# Altium PCB USB-IRIS-W1.PcbDoc (part 1 of 3)
Units mm, origin at the board's own origin, x right, y up, seen from the top; angles counter-clockwise.
Board outline 87.91 x 18 mm, 4 copper layers (Top Layer, Layer 2, Layer 3, Bottom Layer), stack 2.472 mm thick; 87 components, 85 nets, 417 pads, 400 vias.
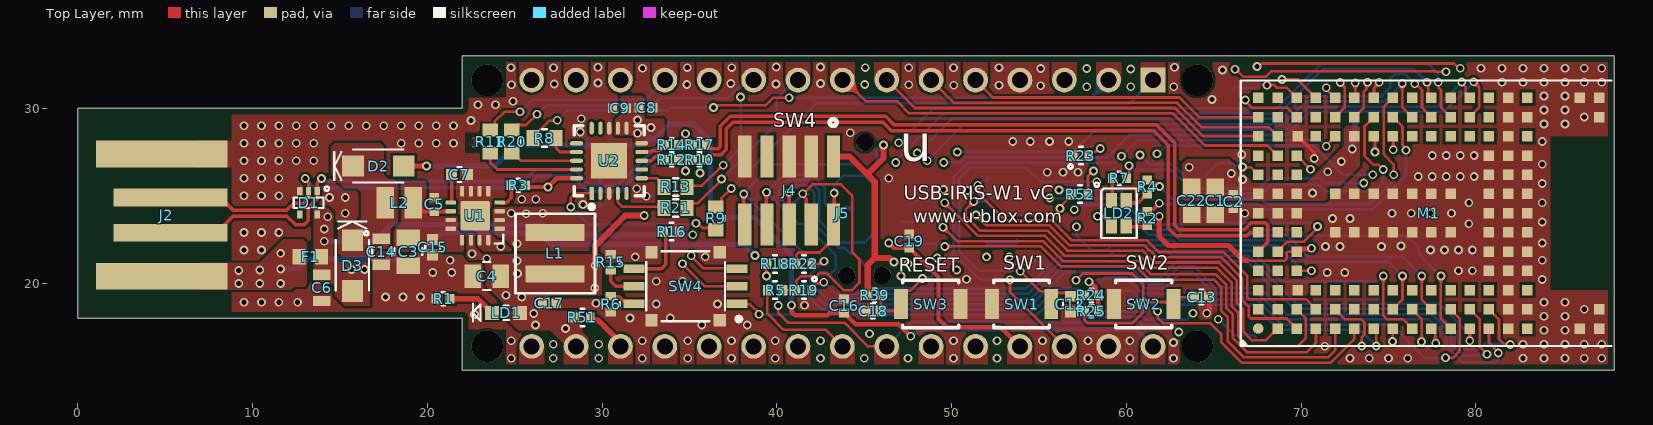
[diagram p0: Top Layer view]
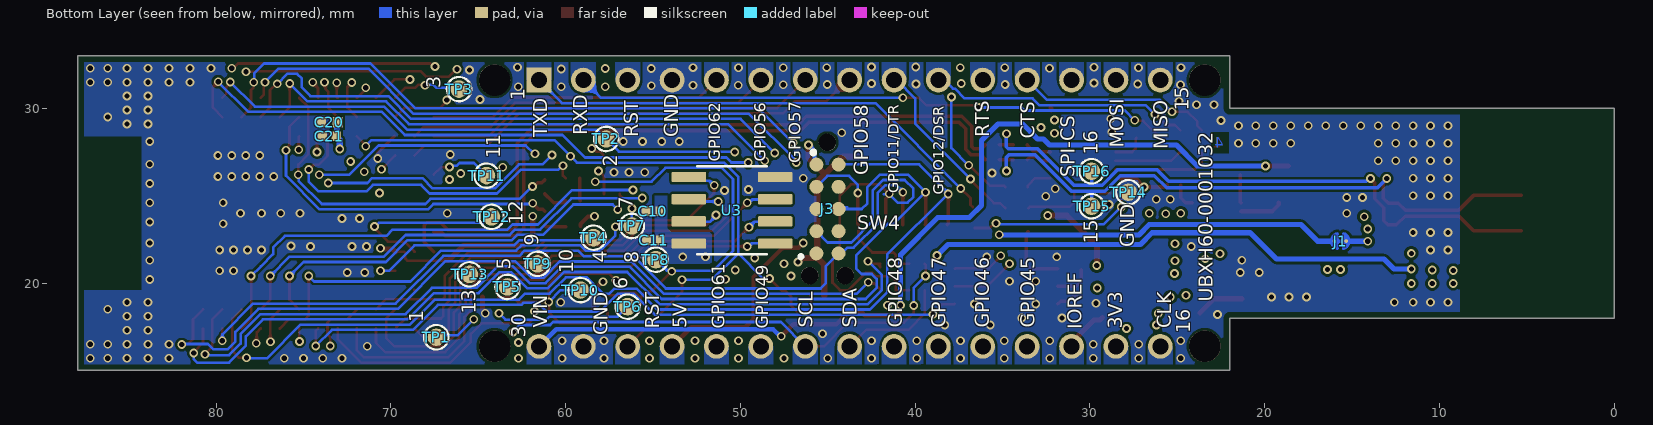
[diagram p1: Bottom Layer view, seen from below]
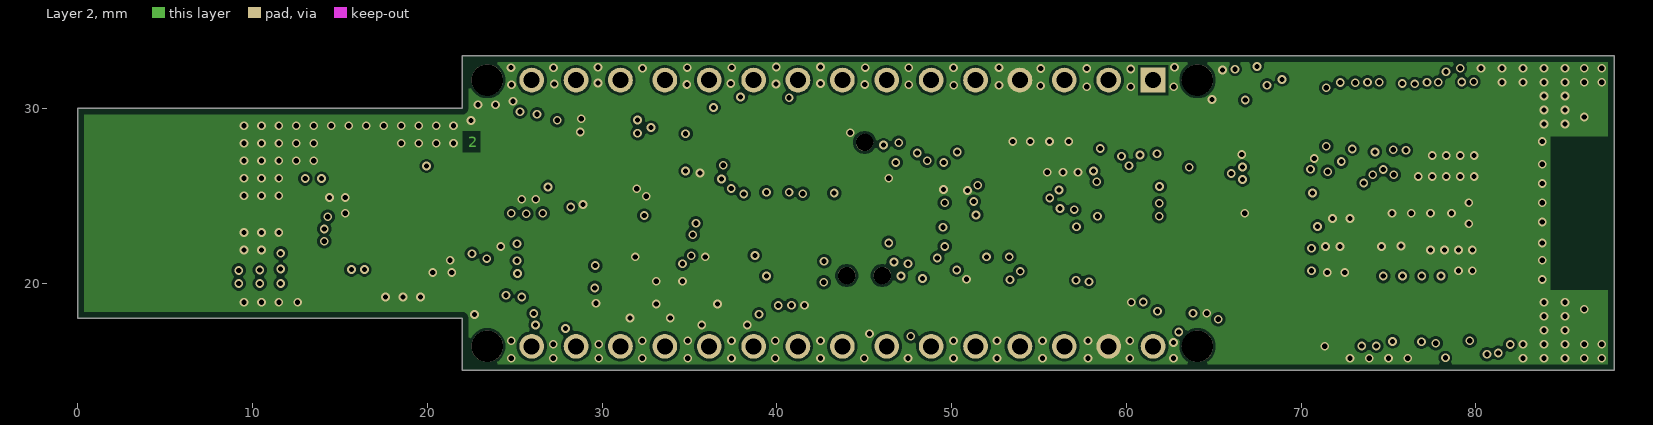
[diagram p2: Layer 2]
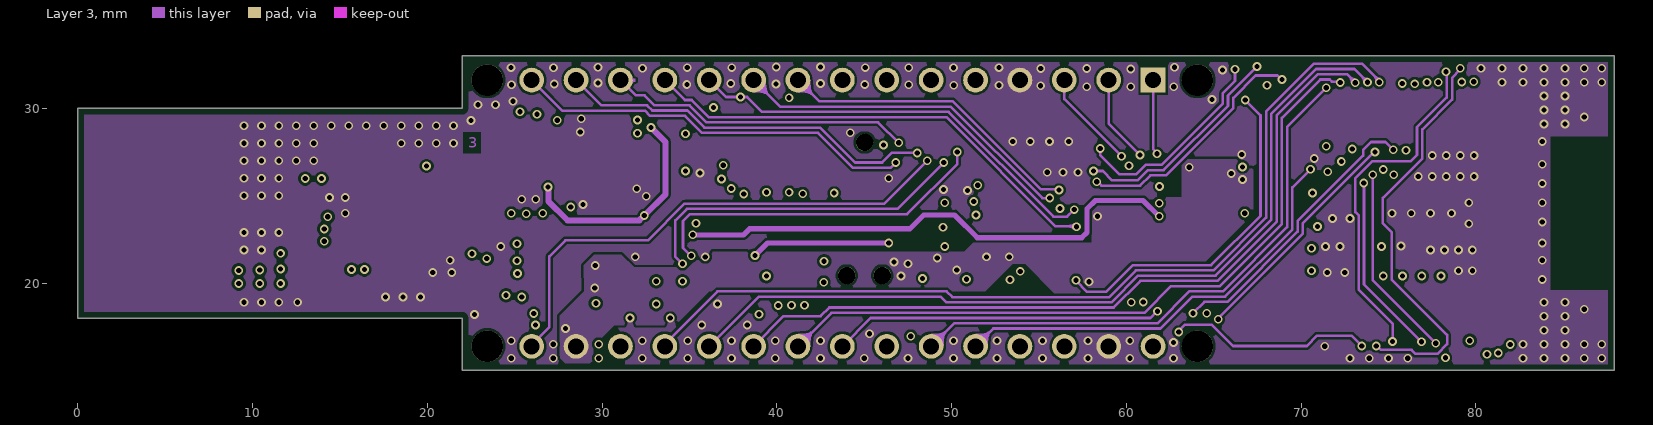
[diagram p3: Layer 3]

## Layer stack, top to bottom
Top Solder: solder mask 0.0102, Solder Resist, Dk 3.5
Top Layer: signal copper 0.035
Dielectric 2: prepreg 0.18, Prepreg 1080, Dk 3.77
Layer 2: signal copper 0.018
Dielectric10: core 2.0057, Core-039, Dk 4.8
Layer 3: signal copper 0.018
Dielectric 7: prepreg 0.18, Prepreg 1080, Dk 3.77
Bottom Layer: signal copper 0.035
Bottom Solder: solder mask 0.0102, Solder Resist, Dk 3.5

## Board outline
0,18 0,30 22,30 22,33 87.909,33 87.909,15 22,15 22,18

## Design rules (kind name [scope] priority, off if disabled: settings)
AssemblyTestPointUsage [All] p1 off:
AssemblyTestpoint [All] p1 off: testpointundercomponent=TRUE minsize=1.016 maxsize=2.54 preferedsize=1.524 minholesize=0 maxholesize=1.016 preferedholesize=0.813 testpointgrid=0.025 usegrid=TRUE gridtolerance=0 allowsidetop=TRUE allowsidebottom=TRUE
BoardOutlineClearance [All] p1: gap=0.356 ignorepadtopadclearanceinfootprint=FALSE
Clearance Clearance_1 [OnLayer('Top Layer')] p1: gap=0.15 ignorepadtopadclearanceinfootprint=TRUE except(0: Arc-Hole Track-Hole SMDPad-Hole THPad-Hole Via-Hole Fill-Hole Poly-Hole Region-Hole Text-Hole)
Clearance [All] p2: gap=0.15 ignorepadtopadclearanceinfootprint=FALSE except(0: Arc-Hole Track-Hole SMDPad-Hole THPad-Hole Via-Hole Fill-Hole Poly-Hole Region-Hole Text-Hole)
Clearance NoPlatedPAd [InPadClass('NPTH_Pads')] p3: gap=0.15 ignorepadtopadclearanceinfootprint=TRUE except(0.25: Fill-Hole Poly-Hole Region-Hole)
Clearance DIFF_100 [InNetClass('DIFF100')] p4: gap=0.25 ignorepadtopadclearanceinfootprint=TRUE except(0: Arc-Hole Track-Hole SMDPad-Hole THPad-Hole Via-Hole Fill-Hole Poly-Hole Region-Hole Text-Hole)
DiffPairsRouting [InDifferentialPairClass('DIFF100')] p1 off: maxlimit=1 minlimit=0.05 mostfreqgap=0.15 toplayer_mingap=0.15 toplayer_minwidth=0.3 toplayer_maxwidth=1 toplayer_prefwidth=0.3 bottomlayer_mingap=0.15 bottomlayer_minwidth=0.3 bottomlayer_maxwidth=1 bottomlayer_prefwidth=0.3 impedanceprofiledriven=TRUE impedanceprofileid={4EB0315E-D057-4056-870E-F8970DFE5718} impedanceprofilevalue=100.000000 maxuncoupledlength=12.7
FabricationTestPointUsage [All] p1 off: valid=0 allowmultiple=FALSE
FabricationTestpoint [All] p1 off: side=3 testpointundercomponent=TRUE minsize=1.016 maxsize=2.54 preferedsize=1.524 minholesize=0 maxholesize=1.016 preferedholesize=0.813 testpointgrid=0.025 allowsidetop=TRUE allowsidebottom=TRUE usegrid=TRUE gridtolerance=0
HoleSize [All] p1: absolutevalues=TRUE maxlimit=2.54 minlimit=0.2 maxpercent=80.000 minpercent=20.000
HoleToHoleClearance [All] p1: gap=0.25 allowstackedmicrovias=TRUE
MatchedLengths DiffPair_DIFF100MatchedLengths [InNetClass('DIFF100')] p1: tolerance=0.1 checknetsindiffpair=TRUE checkdiffpairvsdiffpair=FALSE checkxsignals=FALSE checkothers=FALSE usedelayunits=TRUE delaytolerance=10.000000
MinimumSolderMaskSliver MinimumSolderMaskSliver_1 [InComponent('U4')] p1: minsoldermaskwidth=0.05
MinimumSolderMaskSliver [All] p2: minsoldermaskwidth=0.1
PlaneClearance Shape_via [InNet('3V3') And GND] p2: clearance=0.25
PolygonConnect GND_ [InNet('GND') and IsVia and IsPad] p1 off: thpad.connectstyle=Relief thpad.reliefconductorwidth=0.254 thpad.reliefentries=4 thpad.polygonreliefangle="90 Angle" thpad.airgapwidth=0.254 smdpad.connectstyle=Direct smdpad.reliefconductorwidth=0.254 smdpad.reliefentries=4 smdpad.polygonreliefangle="90 Angle" smdpad.airgapwidth=0.254 via.connectstyle=Direct via.reliefconductorwidth=0.254 via.reliefentries=4 via.polygonreliefangle="90 Angle" via.airgapwidth=0.254
PolygonConnect PolygonConnect_1 [All] p2: connectstyle=Direct reliefconductorwidth=0.254 reliefentries=4 polygonreliefangle="90 Angle" airgapwidth=0.254
RoutingVias [All] p1: holewidth=0.35 width=0.7 viastyle="Through Hole" minholewidth=0.35 minwidth=0.6 maxholewidth=0.35 maxwidth=0.6 useviatemplates=TRUE viatemplateguid#1={9B9B2C8B-3407-41E5-9278-FA540D01F2C8} viatemplateguid#2={13CDBC89-8302-4A6B-AFA1-809CA17073A7} viatemplateguid#3={858E1B08-E57D-4438-9A77-3527DEC644EC} viatemplatename#1=v350h250 viatemplatename#2=v500h250 viatemplatename#3=v550h0300
SilkToSilkClearance [All] p1: silktosilkclearance=0.1
SilkToSolderMaskClearance [IsText] p1: minsilkscreentomaskgap=0.075 clearancetoexposedcopper=TRUE
SolderMaskExpansion TentedVias [isvia] p1: expansion=0.05 istentingtop=TRUE
SolderMaskExpansion [All] p2: expansion=0.05 istentingtop=FALSE
UnRoutedNet [All] p1: checkbadconnections=TRUE
UnpouredPolygon [All] p1 off:
ViasUnderSMD [All] p1: allowed=TRUE
Width Width_1 [All] p1: maxlimit=1.5 minlimit=0.15 preferedwidth=0.254 minimp=50.000000 maximp=50.000000 favimp=50.000000
Width [All] p2: maxlimit=1.5 minlimit=0.1 preferedwidth=0.15 minimp=50.000000 maximp=50.000000 favimp=50.000000
Width 50_ohm_width [InNetClass('Signals')] p3: maxlimit=1.5 minlimit=0.15 preferedwidth=0.15
18 further rules are at their usual default settings.

## Classes and differential pairs
component class U_USB-IRIS-W1_MODULE: C1 C2 C20 C21 C22 J1 M1 R23 TP1 TP3 TP4 TP6 TP11 TP12 TP13
component class U_USB-IRIS-W1_POWER&COMM: C3 C4 C5 C6 C7 C8 C9 C14 C15 D1 D2 D3 F1 J2 L1 L2 LD1 LD2 R1 R2 R3 R4 R7 R8 R9 R10 R11 R12 R13 R14 R17 R20 R21 TP14 TP15 TP16 U1 U2
component class U_USB-IRIS-W1_INTERFACE: C10 C11 C12 C13 C16 C17 C18 C19 is J3 J4 J5 R5 R6 R15 R16 R18 R19 R22 R24 R25 R39 R51 R52 SW1 SW2 SW3 SW4 TP2 TP5 TP7 TP8 TP9 TP10 U3
pad class NPTH_Pads: J2-0
net class DIFF100: USB_I_N USB_I_P USB_IOD_N USB_IOD_P USB_N USB_P
differential pair USB_IOD: +USB_IOD_P -USB_IOD_N
differential pair USB_I: +USB_I_P -USB_I_N
differential pair USB: +USB_P -USB_N

## Components (designator, comment, footprint, x,y, rotation, side; value= is the part's Value field where it differs from the comment)
C1 "UBXH01-000015022U" "Cap 0603" 65.075,24.7 r270 top value=22U
C2 "UBXH01-2021002100N" "Cap 0402 HD"#1 66.116,24.663 r270 top value=100N
C3 "UBXH01-000026110U" "Cap 0805 HD" 18.9,21.8 r270 top value=10U
C4 "UBXH01-000041422U" "Cap 0805 HD" 23.4,20.4 r180 top value=22U
C5 "UBXH01-2021002100N" "Cap 0402 HD"#1 20.4,24.5 r90 top value=100N
C6 "UBXH01-2022001100N" CAP_0603_1750Lx950Wx850H_600x1000Pad_900G_FLX 13.95,19.725 r270 top value=100N
C7 "UBXH01-00230193N3" "CAP 0402"#1 21.836,26.21 r0 top value=3N3
C8 "UBXH01-2021002100N" "Cap 0402 HD"#1 32.512,30.023 r0 top value=100N
C9 "UBXH01-00002434U7" "Cap 0402 HD"#2 31,30 r180 top value=4U7
C10 "UBXH01-00002434U7" "Cap 0402 HD"#1 55,24.1 r0 bottom value=4U7
C11 "UBXH01-2021002100N" "Cap 0402 HD"#1 54.966,22.454 r0 bottom value=100N
C12 "UBXH01-2021002100N" "Cap 0402"#1 56.8,18.8 r270 top value=100N
C13 "UBXH01-2021002100N" "Cap 0402"#1 64.3,19.2 r0 top value=100N
C14 "UBXH01-00002474U7" CAP_0603_1800Lx1000Wx1000H_600x1000Pad_900G_FLX 17.35,21.8 r270 top value=4U7
C15 "UBXH01-00002111N5" "CAP 0402"#2 20.3,22.05 r270 top value=1N5
C16 "UBXH01-2021002100N" "Cap 0402 HD"#1 43.84,18.694 r90 top value=100N
C17 "UBXH01-2021002100N" "Cap 0402 HD"#1 26.975,18.843 r0 top value=100N
C18 "UBXH01-2021002100N" "Cap 0402"#2 45.5,18.4 r180 top value=100N
C19 "UBXH01-2021002100N" "Cap 0402 HD"#1 47.574,22.403 r90 top value=100N
C20 "UBXH01-00002434U7" Cap_0402_1200Lx700Wx700H_600x600Pad_350G_FLX 73.525,29.2 r0 bottom value=4U7
C21 "UBXH01-2021002100N" "Cap 0402 HD"#1 73.525,28.4 r0 bottom value=100N
C22 "UBXH01-000015022U" "Cap 0603" 63.75,24.7 r270 top value=22U
D1 "110-00018" SOT-553 13.2,24.6 r270 top
D2 "110-00005" SOD-123F_U#1 17.2,26.7 r0 top
D3 "110-00005" SOD-123F_U#2 15.7,21 r270 top
F1 "" "IND 0603 HD" 13.3,21.5 r0 top value=330R@100MHz
J1 "Solderbridge-ShortDNP" Solderbridge-Short 15.326,22.4 r0 bottom net-tie
J2 "CON-4PCB" USB-A-PCB 4.995,23.884 r0 top
J3 "TC2050-IDC-NLDNP" TC2050-IDC-NL 45.65,26.78 r270 bottom locked
J4 "130-00099" HDR.050P-10Pin-2x5-SMT_Key 40.7,25.3 r180 top
J5 "UNK_Arduino" UNK_Arduino 42.795,24 r270 top locked
L1 "UBXH09-00001762U2" Ind_4mmx4mm 27.3,21.7 r270 top value=2U2
L2 "UBXH09-00000252U2" "IND 0806" 18.4,24.6 r0 top value=2U2
LD1 "UBXH11-0000018" LED-0603 24.5,18.3 r0 top value=GREEN
LD2 "115-00026" LED_1616 59.575,24 r0 top
M1 "IRIS-W1x6" IRIS-W1x6_LGA152 75.25,24 r0 top
R1 "UBXH18-0008046750R" "RES 0402 HD"#1 20.9,19.1 r180 top value=750R
R2 "UBXH18-0000216360R" "RES 0402 HD"#2 61.2,23.7 r90 top value=360R
R3 "UBXH18-0000005100K" "RES 0402 HD"#2 25.2,25.6 r0 top value=100K
R4 "UBXH18-0000216360R" "RES 0402 HD"#2 61.2,25.5 r90 top value=360R
R5 "UBXH18-00030020R" RES_0402_1100Lx600Wx400H_500x600Pad_400G_FLX#1 39.9,19.6 r0 top value=0R
R6 "UBXH18-00080654K7" RES_0402_1100Lx600Wx400H_500x600Pad_400G_FLX#2 30.5,18.8 r270 top value=4K7
R7 "UBXH18-0008046750R" "RES 0402 HD"#2 59.6,26 r0 top value=750R
R8 "UBXH18-00070731K0" "RES 0603 HD" 26.7,28.3 r180 top value=1K0
R9 "UBXH18-00070731K0" "RES 0603 HD" 36.5,23.7 r90 top value=1K0
R10 "UBXH18-00080491K0" "RES 0402 HD"#2 35.575,27.06 r0 top value=1K0
R11 "UBXH18-00070731K0" "RES 0603 HD" 23.6,28.1 r90 top value=1K0
R12 "UBXH18-00080491K0" "RES 0402 HD"#2 33.975,27.06 r180 top value=1K0
R13 "UBXH18-00070731K0" "RES 0603 HD" 34.2,25.5 r0 top value=1K0
R14 "UBXH18-00080491K0" "RES 0402 HD"#2 33.975,27.91 r180 top value=1K0
R15 "UBXH18-00080654K7" RES_0402_1100Lx600Wx400H_500x600Pad_400G_FLX#2 30.5,21.2 r90 top value=4K7
R16 "UBXH18-00080654K7" RES_0402_1100Lx600Wx400H_500x600Pad_400G_FLX#2 33.975,22.95 r0 top value=4K7
R17 "UBXH18-00080491K0" "RES 0402 HD"#2 35.575,27.91 r180 top value=1K0
R18 "UBXH18-00030020R" RES_0402_1100Lx600Wx400H_500x600Pad_400G_FLX#1 39.9,21.1 r0 top value=0R
R19 "UBXH18-00030020R" RES_0402_1100Lx600Wx400H_500x600Pad_400G_FLX#1 41.55,19.6 r180 top value=0R
R20 "UBXH18-00070731K0" "RES 0603 HD" 24.834,28.1 r90 top value=1K0
R21 "UBXH18-00070731K0" "RES 0603 HD" 34.2,24.3 r0 top value=1K0
R22 "UBXH18-00030020R" RES_0402_1100Lx600Wx400H_500x600Pad_400G_FLX#1 41.55,21.1 r180 top value=0R
R23 "UBXH18-00080654K7" RES_0402_1100Lx600Wx400H_500x600Pad_400G_FLX#1 57.4,27.3 r0 top value=4K7
R24 "UBXH18-000807310K" "RES 0402 HD"#2 58,19.3 r0 top value=10K
R25 "UBXH18-000807310K" "RES 0402 HD"#2 58,18.4 r0 top value=10K
R39 "UBXH18-000807310K" "RES 0402 HD"#2 45.6,19.3 r180 top value=10K
R51 "UBXH18-00030020R" RES_0402_1100Lx600Wx400H_500x600Pad_400G_FLX#3 28.873,18.031 r0 top value=0R
R52 "UBXH18-00080654K7" RES_0402_1100Lx600Wx400H_500x600Pad_400G_FLX#4 57.353,25.095 r0 top value=4K7
SW1 "B3U-1000P" FP-B3U-1000P-MFG 54,18.8 r180 top
SW2 "B3U-1000P" FP-B3U-1000P-MFG 61,18.8 r180 top
SW3 "B3U-1000P" FP-B3U-1000P-MFG 48.8,18.8 r0 top locked
SW4 "UBXH19-0000036" CVS-03 34.776,19.818 r180 top
TP1 "TP" TP10R 67.4,16.9 r0 bottom locked
TP2 "TP" TP10R 57.675,28.25 r90 bottom locked
TP3 "TP" TP10R 66.1,31.1 r90 bottom locked
TP4 "TP" TP10R 58.4,22.6 r90 bottom locked
TP5 "TP" TP10R 63.33,19.78 r90 bottom locked
TP6 "TP" TP10R 56.45,18.65 r90 bottom locked
TP7 "TP" TP10R 56.21,23.27 r90 bottom locked
TP8 "TP" TP10R 54.84,21.34 r90 bottom locked
TP9 "TP" TP10R 61.6,21.1 r90 bottom locked
TP10 "TP" TP10R 59.15,19.6 r90 bottom locked
TP11 "TP" TP10R 64.525,26.15 r90 bottom locked
TP12 "TP" TP10R 64.24,23.79 r90 bottom locked
TP13 "TP" TP10R 65.5,20.5 r90 bottom locked
TP14 "TP" TP10R 27.8,25.2 r90 bottom locked
TP15 "TP" TP10R 29.9,24.4 r90 bottom locked
TP16 "TP" TP10R 29.9,26.4 r90 bottom locked
U1 "TPS62132RGTR" QFN0.5P3x3-16Pin_W-Pad 22.736,23.86 r180 top value=3V3
U2 "FT231XQ-R" QFN_5x5_FT231XQ 30.4,27 r90 top
U3 "23A512-I/SN" SOIC127P599X173-8N 50.48,24.165 r0 bottom

## Footprints (in the part's own frame and the unit in brackets; to place one, negate y for a bottom-side part, rotate by r counter-clockwise, add the part's x,y. Pads: shape width x height; smd on the part's side, far side on the other; paste and mask are expansions set on the pad)
"CAP 0402"#1 [mm] "Chip Capacitor, 2-Leads, Body 1.00x0.50mm, IPC Medium Density"
  rect 0.62x0.62 smd: 1(-0.45,0)
  rect 0.62x0.62 smd mask+0: 2(0.45,0)
  silkscreen extent -0.1,-0.43 0.1,0.43, body extent -0.55,-0.3 0.55,0.3, height 0.6
"CAP 0402"#2 [mm] "Chip Capacitor, 2-Leads, Body 1.00x0.50mm, IPC Medium Density"
  rect 0.62x0.62 smd mask+0: 1(-0.45,0) 2(0.45,0)
  silkscreen extent -0.1,-0.43 0.1,0.43, body extent -0.55,-0.3 0.55,0.3, height 0.6
"Cap 0402"#1 [mm] "Chip Capacitor, 2-Leads, Body 1.00x0.50mm, IPC Medium Density"
  rect 0.62x0.62 smd: 1(-0.45,0) 2(0.45,0)
  silkscreen extent -0.1,-0.43 0.1,0.43, body extent -0.55,-0.3 0.55,0.3, height 0.6
"Cap 0402"#2 [mm] "Chip Capacitor, 2-Leads, Body 1.00x0.50mm, IPC Medium Density"
  rect 0.62x0.62 smd: 1(-0.45,0)
  rect 0.62x0.62 smd mask+0: 2(0.45,0)
  silkscreen extent -0.1,-0.43 0.1,0.43, body extent -0.55,-0.3 0.55,0.3, height 0.6
"Cap 0402 HD"#1 [mm] "Chip Capacitor, 2-Leads, Body 1.00x0.50mm, IPC High Density"
  rect 0.52x0.55 smd: 1(-0.4,0) 2(0.4,0)
  body extent -0.55,-0.3 0.55,0.3, height 0.6
"Cap 0402 HD"#2 [mm] "Chip Capacitor, 2-Leads, Body 1.00x0.50mm, IPC High Density"
  rect 0.52x0.55 smd mask+0: 1(-0.4,0) 2(0.4,0)
  body extent -0.55,-0.3 0.55,0.3, height 0.6
"Cap 0603" [mm] "Cap chip, 0603 1.6mm x 1.8mm, IPC Medium Density"
  rect 0.95x1 smd mask+0: 1(-0.8,0) 2(0.8,0)
  body extent -0.87,-0.48 0.87,0.47, height 0.95
"Cap 0805 HD" [mm] "Cap, 0805, IPC High Density"
  rect 0.95x1.35 smd mask+0: 1(-0.8,0) 2(0.8,0)
  silkscreen extent -0.2,-0.8 0.2,0.8, body extent -1.1,-0.72 1.1,0.72, height 1.1
Cap_0402_1200Lx700Wx700H_600x600Pad_350G_FLX [mm] "Chip Capacitor, 2-Leads, 0402, Tolerance +/-0.2mm, Body max. 1.20x0.70mm, Approved by Flex (Cadence Library compatible)"
  rect 0.6x0.6 smd: 1(-0.475,0) 2(0.475,0)
  body extent -0.6,-0.35 0.6,0.35, height 0.7
CAP_0603_1750Lx950Wx850H_600x1000Pad_900G_FLX [mm] "Chip Cap 0603, 1.75mm x 9.5mm IPC High Density"
  rect 0.6x1 smd: 1(-0.75,0) 2(0.75,0)
  body extent -0.87,-0.48 0.87,0.47, height 0.85
CAP_0603_1800Lx1000Wx1000H_600x1000Pad_900G_FLX [mm] "Chip Cap 0603, 1.75mm x 9.5mm IPC High Density"
  rect 0.6x1 smd mask+0: 1(-0.75,0) 2(0.75,0)
  silkscreen extent -1.17,-0.96 0.15,0.5, body extent -0.9,-0.5 0.9,0.5, height 1
CVS-03 [mm]
  rect 1.2x0.5 smd: 1(-2.95,1) 2(-2.95,0) 3(-2.95,-1) 4(2.95,-1) 5(2.95,0) 6(2.95,1)
  rect 0.7x0.7 smd mask+0: M1(-1.95,1.95) M2(-1.95,-1.95) M3(1.95,-1.95) M4(1.95,1.95)
  silkscreen extent -3.18,-2 2.25,2, body extent -3.05,-2 3.05,2, height 1.48
FP-B3U-1000P-MFG [mm]
  rect 0.8x1.7 smd paste+0 mask+0: 1(-1.7,0) 2(1.7,0)
  silkscreen extent -1.6,-1.35 1.6,1.35, body extent -2.2,-1.45 2.2,1.45, height 0.25
HDR.050P-10Pin-2x5-SMT_Key [mm] "Header, 0.05\" Pitch, 10 Pin 2 x 5, Keyed, SMT, 6.35mm x 5.84mm"
  rect 0.76x2.4 smd: 1(-2.54,-1.95) 2(-2.54,1.95) 3(-1.27,-1.95) 4(-1.27,1.95) 5(0,-1.95) 6(0,1.95) 7(1.27,-1.95) 8(1.27,1.95) 9(2.54,-1.95) 10(2.54,1.95)
  silkscreen extent -2.72,-4.09 -2.32,-3.69, body extent -3.4,-2.9 3.4,2.9, height 5.96
"IND 0603 HD" [mm] "Chip Inductor 0603, 2-Leads, Body 1.60x0.80mm, IPC High Density"
  rect 0.75x0.9 smd mask+0: 1(-0.65,0) 2(0.65,0)
  body extent -0.85,-0.45 0.85,0.45, height 0.9
"IND 0806" [mm] "Inductor 0806, IPC Medium density"
  rect 1x1.8 smd mask+0: 1(-0.8,0) 2(0.8,0)
  body extent -1,-0.8 1,0.8, height 1.8
Ind_4mmx4mm [mm] "Inductor 4mm Square"
  rect 0.98x3.4 smd paste+0 mask+0: 1(-1.185,0) 2(1.185,0)
  silkscreen extent -2.26,-2.26 2.29,2.29, body extent -2.15,-2.15 2.15,2.15, height 2.11
IRIS-W1x6_LGA152 [mm] "IRIS LGA, 152pin ,1.1mm Pitch, 14.6mm x 20.9mm"
  round 0.6 smd: A1(-7.7,-6.6)
  rect 0.6x0.6 smd: A2(-6.6,-6.6) A3(-5.5,-6.6) A4(-4.4,-6.6) A5(-3.3,-6.6) A6(-2.2,-6.6) A7(-1.1,-6.6) A8(0,-6.6) A9(1.1,-6.6) A10(2.2,-6.6) A11(3.3,-6.6) A12(4.4,-6.6) A14(5.5,-6.6) A15(6.6,-6.6) A16(7.7,-6.6) A19(10.7,-6.6) A20(11.8,-6.6) B1(-7.7,-5.5) B2(-6.6,-5.5) B3(-5.5,-5.5) B4(-4.4,-5.5) B5(-3.3,-5.5) B6(-2.2,-5.5) B7(-1.1,-5.5) B8(0,-5.5) B9(1.1,-5.5) B10(2.2,-5.5) B11(3.3,-5.5) B12(4.4,-5.5) B14(5.5,-5.5) B15(6.6,-5.5) B16(7.7,-5.5) B20(11.8,-5.5) C1(-7.7,-4.4) C2(-6.6,-4.4) C3(-5.45,-4.4) C4(-4.4,-4.4) C5(-3.3,-4.4) C6(-2.2,-4.4) C7(-1.1,-4.4) C8(0,-4.4) C9(1.1,-4.4) C10(2.2,-4.4) C11(3.3,-4.4) C12(4.4,-4.4) C14(5.5,-4.4) C15(6.6,-4.4) C16(7.7,-4.4) D1(-7.7,-3.3) D2(-6.6,-3.3) D3(-5.5,-3.3) D14(5.5,-3.3) D15(6.6,-3.3) D16(7.7,-3.3) E1(-7.7,-2.2) E2(-6.6,-2.2) E3(-5.5,-2.2) E14(5.5,-2.2) E15(6.6,-2.2) E16(7.7,-2.2) F1(-7.7,-1.1) F2(-6.6,-1.1) F3(-5.5,-1.1) F5(-3.3,-1.1) F6(-2.2,-1.1) F7(-1.1,-1.1) F8(0,-1.1) F9(1.1,-1.1) F10(2.2,-1.1) F11(3.3,-1.1) F14(5.5,-1.1) F15(6.6,-1.1) F16(7.7,-1.1) G1(-7.7,0) G2(-6.6,0) G3(-5.5,0) G14(5.5,0) G15(6.6,0) G16(7.7,0) H1(-7.7,1.1) H2(-6.6,1.1) H3(-5.5,1.1) H5(-3.3,1.1) H6(-2.2,1.1) H7(-1.1,1.1) H8(0,1.1) H9(1.1,1.1) H10(2.2,1.1) H11(3.3,1.1) H14(5.5,1.1) H15(6.6,1.1) H16(7.7,1.1) J1(-7.7,2.2) J2(-6.6,2.2) J3(-5.5,2.2) J14(5.5,2.2) J15(6.6,2.2) J16(7.7,2.2) K1(-7.7,3.3) K2(-6.6,3.3) K3(-5.5,3.3) K14(5.5,3.3) K15(6.6,3.3) K16(7.7,3.3) L1(-7.7,4.4) L2(-6.6,4.4) L3(-5.45,4.4) L4(-4.4,4.4) L5(-3.3,4.4) L6(-2.2,4.4) L7(-1.1,4.4) L8(0,4.4) L9(1.1,4.4) L10(2.2,4.4) L11(3.3,4.4) L12(4.4,4.4) L14(5.5,4.4) L15(6.6,4.4) L16(7.7,4.4) M1(-7.7,5.5) M2(-6.6,5.5) M3(-5.5,5.5) M4(-4.4,5.5) M5(-3.3,5.5) M6(-2.2,5.5) M7(-1.1,5.5) M8(0,5.5) M9(1.1,5.5) M10(2.2,5.5) M11(3.3,5.5) M12(4.4,5.5) M14(5.5,5.5) M15(6.6,5.5) M16(7.7,5.5) M20(11.8,5.5) N1(-7.7,6.6) N2(-6.6,6.6) N3(-5.5,6.6) N4(-4.4,6.6) N5(-3.3,6.6) N6(-2.2,6.6) N7(-1.1,6.6) N8(0,6.6) N9(1.1,6.6) N10(2.2,6.6) N11(3.3,6.6) N12(4.4,6.6) N14(5.5,6.6) N15(6.6,6.6) N16(7.7,6.6) N19(10.7,6.6) N20(11.8,6.6)
  Multi-Layer pour cut-out: 9,-4.4 12.5,-4.4 12.5,4.4 9,4.4
  silkscreen extent -8.7,-7.6 12.5,7.6, body extent -8.4,-7.3 12.5,7.3, height 2.22
LED-0603 [mm] "led-0603"
  rect 0.8x0.8 smd: 1(-0.8,0) 2(0.8,0)
  silkscreen extent -1.89,-0.48 0.15,0.52, body extent -0.8,-0.4 0.8,0.4, height 0.6
LED_1616 [mm]
  rect 0.65x0.85 smd: 1(-0.425,0.725) 2(0.425,0.725) 3(0.425,-0.725) 4(-0.425,-0.725)
  silkscreen extent -1.4,-1.42 1.01,1.75, body extent -0.83,-0.83 0.83,0.83, height 0.4
QFN0.5P3x3-16Pin_W-Pad [mm] "Quad Flat No-Lead, 0.5mm Pitch, 16 Contact, Exposed Pad, 3mmX3mm"
  rrect50% 0.6x0.24 smd mask+0: 1(-1.4,0.75) 2(-1.4,0.25) 3(-1.4,-0.25) 10(1.4,-0.25) 11(1.4,0.25) 12(1.4,0.75)
  rrect50% 0.6x0.24 smd: 4(-1.4,-0.75) 9(1.4,-0.75)
  rrect50% 0.24x0.6 smd mask+0: 5(-0.75,-1.4) 6(-0.25,-1.4) 7(0.25,-1.4) 8(0.75,-1.4) 13(0.75,1.4) 14(0.25,1.4) 15(-0.25,1.4) 16(-0.75,1.4)
  rrect10% 1.68x1.68 smd mask+0: EPAD(0,0)
  silkscreen extent -1.6,1.1 -1.1,1.6, body extent -1.52,-1.52 1.52,1.52, height 0.9
QFN_5x5_FT231XQ [mm]
  rect 0.74x0.242 smd paste+0: 1(-1.866,1)
  rrect100% 0.74x0.242 smd paste+0: 2(-1.866,0.5) 4(-1.866,-0.5) 5(-1.866,-1) 14(1.866,0.5) 15(1.866,1)
  rrect100% 0.74x0.242 smd paste+0 mask+0: 3(-1.866,0) 11(1.866,-1) 12(1.866,-0.5) 13(1.866,0)
  rrect100% 0.242x0.74 smd paste+0: 6(-1,-1.866) 7(-0.5,-1.866) 8(0,-1.866) 9(0.5,-1.866) 16(1,1.866) 17(0.5,1.866) 18(0,1.866) 19(-0.5,1.866) 20(-1,1.866)
  rrect100% 0.242x0.74 smd paste+0 mask+0: 10(1,-1.866)
  rect 2.05x2.05 smd paste-1000 mask+0: 21(0,0)
  silkscreen extent -2.76,-2 2,2, body extent -2.34,-2.34 2.34,2.34, height 0.25
"RES 0402 HD"#1 [mm] "Chip Resistor, 2-Leads, Body 1.05x0.54mm, IPC High Density"
  rect 0.52x0.55 smd: 1(-0.4,0)
  rect 0.52x0.55 smd mask+0: 2(0.4,0)
  silkscreen extent -0.1,-0.38 0.1,0.38, body extent -0.55,-0.3 0.55,0.3, height 0.4
"RES 0402 HD"#2 [mm] "Chip Resistor, 2-Leads, Body 1.05x0.54mm, IPC High Density"
  rect 0.52x0.55 smd: 1(-0.4,0) 2(0.4,0)
  silkscreen extent -0.1,-0.38 0.1,0.38, body extent -0.55,-0.3 0.55,0.3, height 0.4
"RES 0603 HD" [mm] "Chip Resistor, 2-Leads, Body 1.60x0.80mm, IPC High Density"
  rect 0.75x0.9 smd: 1(-0.65,0) 2(0.65,0)
  silkscreen extent -0.15,-0.5 0.15,0.5, body extent -0.85,-0.48 0.85,0.48, height 0.55
RES_0402_1100Lx600Wx400H_500x600Pad_400G_FLX#1 [mm] "Chip Resistor, 2-Leads, Body 1.05x0.54mm, IPC High Density"
  rect 0.5x0.6 smd: 1(-0.45,0) 2(0.45,0)
  silkscreen extent -0.1,-0.5 0.1,0.5, body extent -0.55,-0.3 0.55,0.3, height 0.4
RES_0402_1100Lx600Wx400H_500x600Pad_400G_FLX#2 [mm] "Chip Resistor, 2-Leads, Body 1.05x0.54mm, IPC High Density"
  rect 0.5x0.6 smd: 1(-0.45,0)
  rect 0.5x0.6 smd mask+0: 2(0.45,0)
  silkscreen extent -0.1,-0.5 0.1,0.5, body extent -0.55,-0.3 0.55,0.3, height 0.4
RES_0402_1100Lx600Wx400H_500x600Pad_400G_FLX#3 [mm] "Chip Resistor, 2-Leads, Body 1.05x0.54mm, IPC High Density"
  rect 0.5x0.6 smd mask+0: 1(-0.45,0)
  rect 0.5x0.6 smd: 2(0.45,0)
  silkscreen extent -0.1,-0.5 0.1,0.5, body extent -0.55,-0.3 0.55,0.3, height 0.4
RES_0402_1100Lx600Wx400H_500x600Pad_400G_FLX#4 [mm] "Chip Resistor, 2-Leads, Body 1.05x0.54mm, IPC High Density"
  rect 0.5x0.6 smd mask+0: 1(-0.45,0) 2(0.45,0)
  silkscreen extent -0.1,-0.5 0.1,0.5, body extent -0.55,-0.3 0.55,0.3, height 0.4
SOD-123F_U#1 [mm] "SOD-123F, Unidirectional, 2-Leads, Body 1.65x3.60mm, IPC High Density"
  rect 1.25x1.2 smd: A(1.45,0)
  rect 1.25x1.2 smd mask+0: C(-1.45,0)
  silkscreen extent -2.52,-0.95 1.43,0.95, body extent -1.45,-0.9 1.45,0.9, height 0.98
SOD-123F_U#2 [mm] "SOD-123F, Unidirectional, 2-Leads, Body 1.65x3.60mm, IPC High Density"
  rect 1.25x1.2 smd mask+0: A(1.45,0) C(-1.45,0)
  silkscreen extent -2.52,-0.95 1.43,0.95, body extent -1.45,-0.9 1.45,0.9, height 0.98
SOIC127P599X173-8N [mm]
  rrect25% 1.98x0.59 smd: 1(-2.47,1.905) 2(-2.47,0.635) 3(-2.47,-0.635) 4(-2.47,-1.905) 5(2.47,-1.905) 6(2.47,-0.635) 7(2.47,0.635) 8(2.47,1.905)
  silkscreen extent -4.04,-2.52 1.99,2.75, body extent -3,-2.45 3,2.45, height 1.75
Solderbridge-Short [mm]
  round 0.2 smd paste-10: 1(0,0) 2(0.676,0)
  Top Layer region: 0.44,0.432 0.516,0.505 0.634,0.467 0.699,0.424 0.772,0.351 0.826,0.292 0.884,0.193 0.912,0.099 0.907,-0.122 0.881,-0.193 0.798,-0.33 0.714,-0.411 0.622,-0.469 0.521,-0.5 0.47,-0.483 0.44,-0.43
  Top Layer region: 0.236,-0.432 0.16,-0.505 0.042,-0.467 -0.023,-0.424 -0.097,-0.351 -0.15,-0.292 -0.208,-0.193 -0.236,-0.099 -0.231,0.122 -0.206,0.193 -0.122,0.33 -0.038,0.411 0.054,0.469 0.155,0.5 0.206,0.483 0.236,0.43
  Top Layer lines w0.152: 0.159,0.431 ccw(c0.27,0) 0.159,-0.431 ; 0.516,0.431 cw(c0.406,0) 0.516,-0.431
  Top Layer lines w0.203: 0,0 0.676,0
SOT-553 [mm] "SOT-553, 5 lead 0.50mm pitch, 1.3mm x 1.7mm"
  rect 0.45x0.3 smd mask+0.05: 1(-0.675,0.5) 2(-0.675,0) 4(0.675,-0.5)
  rect 0.45x0.3 smd mask+0: 3(-0.675,-0.5) 5(0.675,0.5)
  silkscreen extent -0.92,-0.85 0.3,1.18, body extent -0.68,-0.85 0.67,0.85, height 0.6
TC2050-IDC-NL [mm] "CON PADS FOR CBL PLUG-OF-NAILS 10-PIN NO LEGS"
  round 0.8 smd paste-0.9: 1(0,0) 2(1.27,0) 3(2.54,0) 4(3.81,0) 5(5.08,0) 6(5.08,1.27) 7(3.81,1.27) 8(2.54,1.27) 9(1.27,1.27) 10(0,1.27)
  round 1 hole 1 paste-1.1: A(-1.27,0.635) B(6.35,-0.381) C(6.35,1.651)
  Top Layer pour cut-out: 0,1.27 5.08,1.27 5.08,0 0,0
TP10R [mm] "Testpoint, Round 1.0mm Dia"
  round 1 smd paste-0.5: 1(0,0)
  silkscreen extent -0.7,-0.7 0.7,0.7, body extent -0.5,-0.5 0.5,0.5, height 0.05
UNK_Arduino [mil]
  rect 55.67x55.67 hole 35.98 paste-39370.1 mask+0: 1(-300,737.5)
  round 55.67 hole 35.98 paste-39370.1 mask+0: 2(-300,637.5) 3(-300,537.5) 4(-300,437.5) 5(-300,337.5) 6(-300,237.5) 7(-300,137.5) 8(-300,37.5) 9(-300,-62.5) 10(-300,-162.5) 11(-300,-262.5) 12(-300,-362.5) 13(-300,-462.5) 14(-300,-562.5) 15(-300,-662.5) 16(300,-662.5) 17(300,-562.5) 18(300,-462.5) 19(300,-362.5) 20(300,-262.5) 21(300,-162.5) 22(300,-62.5) 23(300,37.5) 24(300,137.5) 25(300,237.5) 26(300,337.5) 27(300,437.5) 28(300,537.5) 29(300,637.5) 30(300,737.5)
USB-A-PCB [mil]
  rect 296x60 smd paste-196.85: 1(-7.87,-137.8) 4(-7.87,138)
  rect 256x40 smd paste-196.85: 2(12,-39.37) 3(12,40)

## Part data
C1 C22: library part UBXH01-0000150, "CAP CER X5R 0603 22U 20% 10V", Manufacturer="Murata Manufacturing Company, Ltd.", Manufacturer P/N=GRM188R61A226ME15D, Max Voltage=10V, Tolerance=20%, Editor=dario.antonaz, Env=ROHS, Mfg P/N Datasheet=https://wiki.u-blox.com/bin/view/Generic/Docs/DocumentSummary?index=21277, Mfg P/N Released=Yes, Mfg P/N Split=100, Mfg P/N Status=Active, Part Number=UBXH01-0000150, Part Type=Capacitor, Perferred=PREF, Permitted Use="Volume Products", RefDes=C, Release Data=2016-03-09T11:21:55, Released by=pasquale.scorca, Size=0603, UBX Wiki=https://wiki.u-blox.com/bin/view/Operations/PartDetails?index=21275
C2 C5 C8 C11 C12 C13 C16 C17 C18 C19 C21: library part UBXH01-2021002, "CAP CER X5R 0402 100N 10% 10V", Manufacturer="Murata Manufacturing Company, Ltd.", Manufacturer 2="Samsung Electro-Mechanics", Manufacturer P/N=GRM155R61A104KA01, Manufacturer P/N 2=CL05A104KP5NNN, Max Voltage=10V, Tolerance=10%, Editor=roland.rust, Env=GREEN, Mfg P/N Datasheet 2=https://wiki.u-blox.com/bin/view/Generic/Docs/DocumentSummary?index=28113, Mfg P/N Released=Yes, Mfg P/N Released 2=Yes, Mfg P/N Split=100, Mfg P/N Split 2=0, Mfg P/N Status=NRND, Mfg P/N Status 2=Active, Part Number=UBXH01-2021002, Part Type=Capacitor, Perferred=PREF, Permitted Use="Volume Products", RefDes=C, Release Data=2005-07-22T13:59:44, Released by=roland.rust, Size=0402, UBX Wiki=https://wiki.u-blox.com/bin/view/Operations/PartDetails?index=5759
C3: library part UBXH01-0000261, "CAP CER X5R 0805 10U 10% 25V", Manufacturer="Murata Manufacturing Company, Ltd.", Manufacturer P/N=GRM21BR61E106KA73, Max Voltage=25V, Tolerance=10%, Editor=erian.bezhani, Env=ROHS, Mfg P/N Released=Yes, Mfg P/N Split=100, Mfg P/N Status=Active, Part Number=UBXH01-0000261, Part Type=Capacitor, Perferred=PREF, Permitted Use="Volume Products", RefDes=C, Release Data=2019-05-03T17:04:27, Released by=alex.claville, Size=0805, UBX Wiki=https://wiki.u-blox.com/bin/view/Operations/PartDetails?index=24683
C4: library part UBXH01-0000414, "CAP CER X5R 0805 22U 20% 25V", Manufacturer="Murata Manufacturing Company, Ltd.", Manufacturer P/N=GRM21BR61E226ME44L, Max Operating Temp=85°C, Max Voltage=25V, Min Operating Temp=-55°C, Tolerance=20%, Editor=jaakko.jussila, Env=ROHS, Mfg P/N Datasheet=https://wiki.u-blox.com/bin/view/Generic/Docs/DocumentSummary?index=29981, Mfg P/N Released=No, Mfg P/N Split=100, Mfg P/N Status=Active, Part Number=UBXH01-0000414, Part Type=Capacitor, Perferred=PREF, Permitted Use="Support Products", RefDes=C, Size=0805, UBX Wiki=https://wiki.u-blox.com/bin/view/Operations/PartDetails?index=30004
C6: library part UBXH01-2022001, "CAP CER X7R 0603 100N 10% 50V", Manufacturer="Murata Manufacturing Company, Ltd.", Manufacturer 2="Samsung Electro-Mechanics", Manufacturer 3="TDK Corporation", Manufacturer P/N=GRM188R71H104KA93, Manufacturer P/N 2=CL10B104KB8NFNC, Manufacturer P/N 3=CGA3E2X7R1H104K080AA, Max Voltage=50V, Tolerance=10%, Editor=andreas.thiel, Env=ROHS, Mfg P/N Datasheet=https://wiki.u-blox.com/bin/view/Generic/Docs/DocumentSummary?index=8644, Mfg P/N Datasheet 2=https://wiki.u-blox.com/bin/view/Generic/Docs/DocumentSummary?index=29478, Mfg P/N Datasheet 3=https://wiki.u-blox.com/bin/view/Generic/Docs/DocumentSummary?index=29486, Mfg P/N Released=Yes, Mfg P/N Released 2=Yes, Mfg P/N Released 3=Yes, Mfg P/N Split=100, Mfg P/N Split 2=0, Mfg P/N Split 3=0, Mfg P/N Status=Obsolete, Mfg P/N Status 2=Active, Mfg P/N Status 3=Active, Part Number=UBXH01-2022001, Part Type=Capacitor, Perferred=NONPREF, Permitted Use="Volume Products", RefDes=C, Release Data=2010-04-01T16:00:29, Released by=johann.furrer, Size=0603, UBX Wiki=https://wiki.u-blox.com/bin/view/Operations/PartDetails?index=5767
C7: library part UBXH01-0023019, "CAP CER X7R 0402 3N3 10% 16V", Manufacturer="Murata Manufacturing Company, Ltd.", Manufacturer P/N=GRM155R71H332KA01, Max Voltage=16V, Tolerance=10%, Editor=dario.antonaz, Env=ROHS, Mfg P/N Datasheet=https://wiki.u-blox.com/bin/view/Generic/Docs/DocumentSummary?index=19430, Mfg P/N Released=Yes, Mfg P/N Split=100, Mfg P/N Status=NRND, Part Number=UBXH01-0023019, Part Type=Capacitor, Perferred=PREF, Permitted Use="Volume Products", RefDes=C, Release Data=2013-08-21T12:21:41, Released by=pierpaolo.arban, Size=0402, UBX Wiki=https://wiki.u-blox.com/bin/view/Operations/PartDetails?index=5479
C9 C10: library part UBXH01-0000243, "CAP CER X5R 0402", Manufacturer="Murata Manufacturing Company, Ltd.", Manufacturer P/N=GRM155R61A475MEAA, Max Operating Temp=85°C, Max Voltage=10.0V, Min Operating Temp=-40°C, Tolerance=20%, Editor=dario.antonaz, Env=ROHS, Mfg P/N Datasheet=https://wiki.u-blox.com/bin/view/Generic/Docs/DocumentSummary?index=24302, Mfg P/N Released=Yes, Mfg P/N Split=100, Mfg P/N Status=Active, Part Number=UBXH01-0000243, Part Type=Capacitor, Perferred=PREF, Permitted Use="Volume Products", RefDes=C, Release Data="2016-03-17 10:02:21.014314", Released by=pasquale.scorca, Size=0x0y, UBX Wiki=https://wiki.u-blox.com/bin/view/Operations/PartDetails?index=24303
C14: library part UBXH01-0000247, "CAP CER X5R 0603 4U7 20% 10V", Manufacturer="Murata Manufacturing Company, Ltd.", Manufacturer P/N=GRM185R61A475ME11, Max Operating Temp=85°C, Max Voltage=10V, Min Operating Temp=-40°C, Tolerance=20%, Editor=dario.antonaz, Env=ROHS, Mfg P/N Datasheet=https://wiki.u-blox.com/bin/view/Generic/Docs/DocumentSummary?index=24364, Mfg P/N Released=Yes, Mfg P/N Split=100, Mfg P/N Status=NRND, Part Number=UBXH01-0000247, Part Type=Capacitor, Perferred=PREF, Permitted Use="Volume Products", RefDes=C, Release Data=2018-01-09T13:14:17, Released by=martin.grasse, Size=0603, UBX Wiki=https://wiki.u-blox.com/bin/view/Operations/PartDetails?index=24365
C15: library part UBXH01-0000211, "CAP CER X7R 0402 1N5 10% 50V", Manufacturer="Murata Manufacturing Company, Ltd.", Manufacturer 2="Samsung Electro-Mechanics", Manufacturer P/N=GRM155R71H152KA01, Manufacturer P/N 2=CL05B152KB5NNN, Max Operating Temp=125°C, Max Voltage=50V, Min Operating Temp=-55°C, Tolerance=10%, Editor=domenico.volpe, Env=ROHS, Mfg P/N Datasheet=https://wiki.u-blox.com/bin/view/Generic/Docs/DocumentSummary?index=23371, Mfg P/N Datasheet 2=https://wiki.u-blox.com/bin/view/Generic/Docs/DocumentSummary?index=23370, Mfg P/N Released=Yes, Mfg P/N Released 2=Yes, Mfg P/N Split=100, Mfg P/N Split 2=0, Mfg P/N Status=NRND, Mfg P/N Status 2=Active, Part Number=UBXH01-0000211, Part Type=Capacitor, Perferred=PREF, Permitted Use="Volume Products", RefDes=C, Release Data=2015-11-04T16:43:52, Released by=massimo.vlacci, Size=0402, UBX Wiki=https://wiki.u-blox.com/bin/view/Operations/PartDetails?index=23369
C20: library part UBXH01-0000243, "CAP CER X5R 0402 4U7 20% 10V", Manufacturer="Murata Manufacturing Company, Ltd.", Manufacturer P/N=GRM155R61A475MEAA, Max Operating Temp=85°C, Max Voltage=10V, Min Operating Temp=-40°C, Tolerance=20%, Editor=martin.pilik, Env=GREEN, Mfg P/N Datasheet=https://wiki.u-blox.com/bin/view/Generic/Docs/DocumentSummary?index=24302, Mfg P/N Released=Yes, Mfg P/N Split=100, Mfg P/N Status=Active, Part Number=UBXH01-0000243, Part Type=Capacitor, Perferred=PREF, Permitted Use="Volume Products", RefDes=C, Release Data=2021-05-10T12:57:47, Released by=fabrice.bret-dibat, Size=0402, UBX Wiki=https://wiki.u-blox.com/bin/view/Operations/PartDetails?index=24303
D1: "LOW-CAPACITANCE 3-CHANNEL ESD-PROTECTION ARRAY", Manufacturer="Texas Instruments", Manufacturer P/N=TPD3E001DRLR, MFG Package=SOT-553, Package Type=SOT, Part Name="TVS Diode, 3CH High Speed ESD", Supplier Part Number 1=296-21885-1-ND, Voltage=5V, Arena Link=https://app.bom.com/a/UCV39GZGZIHX50AE?v=spec.summary, Body Size="1.6mm x 1.2mm", Component Mounting Type=SMT, Diode Type=TVS, Height=.55mm, Item_Phase=Production, Part Number=110-00018, Part_Type=Diode, Pins=5, Revision=0A, Supplier 1=Digi-Key, Use in new designs=Yes
D2 D3: "Diode, Schottky, 20V 1A SOD-123F, 340mV Vf @ 1A / MBR120VLSFT3G", Current=1A, Manufacturer 1="ON Semiconductor", Manufacturer 2=None, Manufacturer Part Number 1=MBR120VLSFT3G, Max Operating Temp=125, MFG Package=SOD-123FL, Min Operating Temp=-65, Part Name="Diode Schottky 20V 1A SOD-123FL", Supplier Part Number 1=MBR120VLSFT3GOSCT-ND, Voltage=20V, Body Size=None, Height=0.98mm, Item Phase="In Production", Manufacturer Part Number 2=None, Part Number=110-00005, Pins=2, Revision=0B, Supplier 1=Digi-Key, Supplier 2=None, Supplier Part Number 2=None, UBX Code=None, Use in new designs=Yes
F1: library part "FB sm", "FERRITE BEAD MURATA BLM18KG 0603 330R@100MHz", Manufacturer="Murata Electronics", Manufacturer P/N=BLM18KG331BH1D, Env=ROHS, Mfg P/N Released=Yes, Mfg P/N Split=100, Mfg P/N Status=Active, Part Type=Ferrite, Perferred=PREF, Permitted Use="Volume Products", RefDes=FB, Size=0603
J1: library part Solderbridge-Short, "Solderbridge-Short", Added By="Paul B", Added Date=12/2/2015, DNP=DNP, Height=0, Part Number=Solderbridge-Short
J2: library part UBXH04-0000711, "CONN USB PLUG A TYPE PCB FOOTPRINT", Editor=aneeb.sohail, Env=ROHS, Part Number=UBXH04-0000711, Part Type=Connector, Perferred=N/A, Permitted Use="Support Products", RefDes=J, UBX Wiki=https://wiki.u-blox.com/bin/view/Operations/PartDetails?index=35472
J3: library part TC2050-IDC-NL, "CON PADS FOR CBL PLUG-OF-NAILS 10-PIN NO LEGS", Manufacturer="TAG Connect", Added By="Paul B", Added Date=12/3/2015, DNP=DNP, Height=0, Manufacturer P/N=TC2050-IDC-NL, Part Number=TC2050-IDC-NL, Size="6.1mm x 9.9mm"
J4: "Header 0.05\" 10Pin 2Row SMD Black", Color=Black, Manufacturer=Samtec, Manufacturer P/N=FTSH-105-01-F-DV-K, Part Name="CON HDR 0.05\" 10Pin 2Row SMD Black", Supplier Part Number 1=SAM8796-ND, Arena Link=https://app.bom.com/a/5N6EKRARATS7TSHL?v=spec.summary, Component Mounting Type=SMT, Connector Type=Header, Height=6mm, Item_Phase=Pre-Production, Keyed=Yes, Length=12.75mm, Locking=No, Part Number=130-00099, Part_Type=Connector, Pin Pitch="0.050\"", Pins=10, Revision=1, Rows=2, Supplier 1=Digi-Key, Use in new designs=Yes, Width=4.78
J5: library part UBXH04-0000717, "ARDUINO NANO 33 IOT CONN", Max Operating Temp=85°C, Min Operating Temp=-40°C, Editor=aneeb.sohail, Env=ROHS, Part Number=UBXH04-0000717, Part Type=Connector, Perferred=PREF, Permitted Use="Support Products", RefDes=J, UBX Wiki=https://wiki.u-blox.com/bin/view/Operations/PartDetails?index=35490
L1: library part UBXH09-0000176, "SHIELDED POWER INDUCTOR XFL4020 2U2 20% 3.1A", Manufacturer=Coilcraft, Manufacturer P/N=XFL4020-222ME, Max Current=3.1A, Max Operating Temp=125°C, Min Operating Temp=-40°C, Tolerance=20%, Editor=roland.rust, Env=ROHS, Mfg P/N Datasheet=https://wiki.u-blox.com/bin/view/Generic/Docs/DocumentSummary?index=22577, Mfg P/N Released=Yes, Mfg P/N Split=100, Mfg P/N Status=Active, Part Number=UBXH09-0000176, Part Type=Inductor, Perferred=PREF, Permitted Use="Support Products", RefDes=L, Release Data=2015-06-17T10:51:21, Released by=olof.viklund, Size=0x0y, UBX Wiki=https://wiki.u-blox.com/bin/view/Operations/PartDetails?index=22578
L2: library part UBXH09-0000025, "IND MURATA LQM2MP 0806 2U2 30% 1.2A", Manufacturer="Murata Manufacturing Company, Ltd.", Manufacturer P/N=LQM2MPN2R2NG0, Max Current=1.2A, Max Operating Temp=125°C, Min Operating Temp=-55°C, Tolerance=30%, Editor=martin.pilik, Env=GREEN, Mfg P/N Datasheet=https://wiki.u-blox.com/bin/view/Generic/Docs/DocumentSummary?index=9215, Mfg P/N Released=Yes, Mfg P/N Split=100, Mfg P/N Status=Active, Part Number=UBXH09-0000025, Part Type=Inductor, Perferred=PREF, Permitted Use="Volume Products", RefDes=L, Release Data=2021-05-07T14:56:17, Released by=fabrice.bret-dibat, Size=0806, UBX Wiki=https://wiki.u-blox.com/bin/view/Operations/PartDetails?index=9109
LD1: "LED CHIP 0603 LOW CURRENT OSRAM 0.002A", Manufacturer=Osram, Manufacturer P/N="LG L29K-G2J1-24", Max Current=2mA, Max Operating Temp=85°C, Max Voltage=2.2V, Min Operating Temp=-40°C, Editor=johann.furrer, Env=ROHS, Mfg P/N Datasheet=https://wiki.u-blox.com/bin/view/Generic/Docs/DocumentSummary?index=20620, Mfg P/N Released=Yes, Mfg P/N Split=100, Mfg P/N Status=Active, Part Number=UBXH11-0000018, Part Type=LED, Perferred=PREF, Permitted Use="Volume Products", RefDes=DS, Release Data="2018-01-09 15:31:38.754561", Released by=martin.grasse, UBX Wiki=https://wiki.u-blox.com/bin/view/Operations/PartDetails?index=20619
LD2: "LED RGB SMT 0606", Current=20mA, Manufacturer 1="Lite-On Inc", Manufacturer Part Number 1=LTST-C19HE1WT, Max Operating Temp=80, MFG Package=0606, Min Operating Temp=-20, Supplier Part Number 1=160-2162-1-ND, Voltage=None, Body Size="1.6mm x 1.6mm", Height=0.35mm, Item Phase="In Production", Part Name="LED RGB SMT 0606", Part Number=115-00026, Pins=4, Revision=0B, Size=Other, Supplier 1=Digi-Key, Supplier 2=Digi-Key, Supplier Part Number 2=1516-1184-1-ND, UBX Code=None, Use in new designs=Yes
M1: library part UBXH14-0000681, "SHORT RANGE STAND-ALONE MULTIRADIO MODULE U-BLOX IRIS-W106", Max Operating Temp=85°C, Min Operating Temp=-40°C, Editor=olof.viklund, Env=ROHS, Part Number=UBXH14-0000681, Part Type=RF, Perferred=PREF, Permitted Use="Volume Products", RefDes=A, UBX Wiki=https://wiki.u-blox.com/bin/view/Operations/PartDetails?index=38240
R1 R7: library part UBXH18-0008046, "RES THICK FILM CHIP 0402", Manufacturer=Panasonic, Manufacturer P/N=ERJ2GEJ751X, Max Power=100mW, Tolerance=5%, Editor=jaka.bevk, Env=ROHS, Mfg P/N Datasheet=https://wiki.u-blox.com/bin/view/Generic/Docs/DocumentSummary?index=21267, Mfg P/N Released=Yes, Mfg P/N Split=100, Mfg P/N Status=Active, Part Number=UBXH18-0008046, Part Type=Resistor, Perferred=PREF, Permitted Use="Volume Products", RefDes=R, Release Data="2014-10-03 09:31:33.687559", Released by=erian.bezhani, Size=0x0y, UBX Wiki=https://wiki.u-blox.com/bin/view/Operations/PartDetails?index=6935
R2 R4: library part UBXH18-0000216, "RES THICK FILM CHIP 0402", Manufacturer=KOA, Manufacturer P/N=RK73H1ETTP3600F, Max Power=63mW, Tolerance=1%, Automotive=Yes, Editor=michael.hein, Env=ROHS, Mfg P/N Datasheet=https://wiki.u-blox.com/bin/view/Generic/Docs/DocumentSummary?index=8222, Mfg P/N Released=Yes, Mfg P/N Split=100, Mfg P/N Status=Active, Part Number=UBXH18-0000216, Part Type=Resistor, Perferred=PREF, Permitted Use="Volume Products", RefDes=R, Release Data="2015-10-02 11:55:45.476057", Released by=vasyl.dykyy, Size=0x0y, UBX Wiki=https://wiki.u-blox.com/bin/view/Operations/PartDetails?index=23306
R3: library part UBXH18-0000005, "RES THICK FILM CHIP 0402 100K 1% 63mW", Manufacturer=KOA, Manufacturer 2=ROHM, Manufacturer P/N=RK73H1ETTP1003F, Manufacturer P/N 2=MCR01MZPF1003, Max Power=63mW, Tolerance=1%, Editor=dario.antonaz, Env=ROHS, Mfg P/N Datasheet=https://wiki.u-blox.com/bin/view/Generic/Docs/DocumentSummary?index=8222, Mfg P/N Datasheet 2=https://wiki.u-blox.com/bin/view/Generic/Docs/DocumentSummary?index=8186, Mfg P/N Released=Yes, Mfg P/N Released 2=Yes, Mfg P/N Split=100, Mfg P/N Split 2=0, Mfg P/N Status=Active, Mfg P/N Status 2=Active, Part Number=UBXH18-0000005, Part Type=Resistor, Perferred=N/A, Permitted Use="Volume Products", RefDes=R, Release Data=2009-11-30T11:05:22, Released by=sandro.sestan, Size=0402, UBX Wiki=https://wiki.u-blox.com/bin/view/Operations/PartDetails?index=8114
R5 R18 R19 R22 R51: library part UBXH18-0003002, "RES THICK FILM CHIP 0402 0R 0 100mW", Manufacturer=KOA, Manufacturer 2=YAGEO, Manufacturer P/N=RK73Z1ETTD, Manufacturer P/N 2=2322_705_91001_L, Max Power=100mW, Tolerance=0, Editor=charlotte.biber, Env=ROHS, Mfg P/N Released=Yes, Mfg P/N Released 2=Yes, Mfg P/N Split=100, Mfg P/N Split 2=0, Mfg P/N Status=NRND, Mfg P/N Status 2=Obsolete, Part Number=UBXH18-0003002, Part Type=Resistor, Perferred=PREF, Permitted Use="Volume Products", RefDes=R, Release Data=2012-06-05T09:49:55, Released by=peter.mueller, Size=0402, UBX Wiki=https://wiki.u-blox.com/bin/view/Operations/PartDetails?index=6611
R6 R15 R16 R23 R52: library part UBXH18-0008065, "RES THICK FILM CHIP 0402 4K7 5% 100mW", Manufacturer=YAGEO, Manufacturer 2=KOA, Manufacturer P/N=2322_705_70472_L, Manufacturer P/N 2=RK73B1ETTD472J, Max Power=100mW, Tolerance=5%, Editor=martin.frauchiger, Env=ROHS, Mfg P/N Released=Yes, Mfg P/N Released 2=Yes, Mfg P/N Split=100, Mfg P/N Split 2=0, Mfg P/N Status=NRND, Mfg P/N Status 2=NRND, Part Number=UBXH18-0008065, Part Type=Resistor, Perferred=PREF, Permitted Use="Volume Products", RefDes=R, Release Data=2005-08-19T10:42:45, Released by=martin.frauchiger, Size=0402, UBX Wiki=https://wiki.u-blox.com/bin/view/Operations/PartDetails?index=6969
R8 R9 R11 R13 R20 R21: library part UBXH18-0007073, "RES THICK FILM CHIP 0603 1K0 5% 100mW", Manufacturer=YAGEO, Manufacturer 2=ROHM, Manufacturer P/N=RC0603JR-071KL, Manufacturer P/N 2=MCR03EZPJ102, Max Power=100mW, Tolerance=5%, Editor=roland.rust, Env=ROHS, Mfg P/N Released=Yes, Mfg P/N Released 2=Yes, Mfg P/N Split=100, Mfg P/N Split 2=0, Mfg P/N Status=Active, Mfg P/N Status 2=Active, Part Number=UBXH18-0007073, Part Type=Resistor, Perferred=PREF, Permitted Use="Volume Products", RefDes=R, Release Data=2008-06-24T15:59:29, Released by=roland.rust, Size=0603, UBX Wiki=https://wiki.u-blox.com/bin/view/Operations/PartDetails?index=6701
R10 R12 R14 R17: library part UBXH18-0008049, "RES THICK FILM CHIP 0402 1K0 5% 100mW", Manufacturer=YAGEO, Manufacturer 2=KOA, Manufacturer P/N=2322_705_70102_L, Manufacturer P/N 2=RK73B1ETTD102J, Max Power=100mW, Tolerance=5%, Editor=roland.rust, Env=ROHS, Mfg P/N Released=Yes, Mfg P/N Released 2=Yes, Mfg P/N Split=100, Mfg P/N Split 2=0, Mfg P/N Status=Obsolete, Mfg P/N Status 2=NRND, Part Number=UBXH18-0008049, Part Type=Resistor, Perferred=PREF, Permitted Use="Volume Products", RefDes=R, Release Data=2005-07-22T13:59:44, Released by=roland.rust, Size=0402, UBX Wiki=https://wiki.u-blox.com/bin/view/Operations/PartDetails?index=6939
R24 R25 R39: library part UBXH18-0008073, "RES THICK FILM CHIP 0402 10K 5% 100mW", Manufacturer=YAGEO, Manufacturer P/N=2322_705_87103_L, Max Power=100mW, Tolerance=5%, Editor=martin.frauchiger, Env=ROHS, Mfg P/N Released=Yes, Mfg P/N Split=0, Mfg P/N Status=NRND, Part Number=UBXH18-0008073, Part Type=Resistor, Perferred=PREF, Permitted Use="Volume Products", RefDes=R, Release Data="2005-08-19 10:42:45", Released by=martin.frauchiger, Size=0402, UBX Wiki=https://wiki.u-blox.com/bin/view/Operations/PartDetails?index=6981
SW1 SW2 SW3: library part CMP-2100-03586-2, "SWITCH TACTILE SPST-NO 0.05A 12V", Contact Current Rating=50mA, Contact Resistance=100mR, Insulation Resistance=100MR, Max Operating Temperature=70°C, Max Voltage Rating (DC)=12V, Min Operating Temperature=-25°C, Operating Force=1.5N, Package Quantity=1, Ratings="Dust Proof", Actuator Length=0.4mm, Actuator Type=Standard, Contact Material=Silver, Current Rating=50mA, Depth=2.5mm, Electrical Life=200000Cycles, Height=1.2mm, Illumination Type=Non-Illuminated, Lead Free="Lead Free", Length=4mm, Max Current Rating=50mA, Mechanical Life=200000Cycles, Mount="Surface Mount", Orientation=Straight, Packaging="Tape and Reel", Switch Function=Off-Mom, Switch Travel=0.15mm, Termination=SMD/SMT, Throw Configuration=SPST, Voltage Rating (DC)=12V, Weight=0.000776oz, Width=3mm
SW4: library part CVS-03TB, "Dip Switch SPST 3 Position Surface Mount Slide (Standard) Actuator 100mA 6VDC", Current=100mA, Manufacturer 1="Nidec Components Corporation", Manufacturer 2=None, Max Operating Temp=85, Min Operating Temp=-40, Supplier Part Number 1=563-1194-1-ND, Voltage=6V, Arena Link=https://app.bom.com/a/4M5DJQ9Q9SR7OCE3?v=spec.summary, Component Mounting Type=SMT, Height=1.45mm, Item Phase=Unreleased, Item_Phase=Active, Length=6.1mm, Manufacturer Part Number 1=CVS-03TB, Manufacturer Part Number 2=None, Part Name=CVS-03TB, Part Number=UBXH19-0000036, Part_Type=Switch, Pins=6, Revision=A, Supplier 1=Digi-Key, Supplier 2=None, Supplier Part Number 2=None, Switch/Button Circuit=SPST, Switch/Button Function=On-Off, UBX Code=None, Use in new designs=Yes, Width=6.2mm
TP1 TP2 TP3 TP4 TP5 TP6 TP7 TP8 TP9 TP10 TP11 TP12 TP13 TP14 TP15 TP16: library part TP10R, "Testpoint, Round 1.0mm Dia", Added By="Jeremy D", Added Date=2/1/2015, Checked By="Paul B", Checked Date=2/5/2015, DNP=DNP, Height=0, Part Number=TP10R, Size=1.0mm
U1: library part UBXH12-0000160, "STEP DOWN DC-DC CONVERTER 3-17V 3A TPS62132 3V3", Manufacturer="Texas Instruments", Manufacturer P/N=TPS62132RGTT, Max Operating Temp=85°C, Min Operating Temp=-40°C, Rating=Catalog, Switch Current Limit(Typ)(A)=4.2, Code_JEDEC=MO-220, ComponentLink1Description=Datasheet, ComponentLink1URL=http://www.ti.com/general/docs/lit/getliterature.tsp?genericPartNumber=TPS62132&fileType=pdf, ComponentLink2Description="Package Specification", ComponentLink2URL=http://www.ti.com/litv/pdf/mpqf119g, ComponentLink3Description="URL Link1", ComponentLink3URL="Samples URL:http://www.ti.com/product/tps62132#samples", DatasheetVersion=SLVSAG7, Duty Cycle(Max)(%)=100, Eco-Plan="Green (RoHS & no Sb/Br)", Editor=andre.pick, Env=GREEN, Iout(Max)(A)=3, Iq(Typ)(mA)=0.017, Manufacturer Part Number=TPS62132RGTR, Mfg P/N Datasheet=https://wiki.u-blox.com/bin/view/Generic/Docs/DocumentSummary?index=19244, Mfg P/N Released=Yes, Mfg P/N Split=100, Mfg P/N Status=Active, Mounting Technology="Surface Mount", PackageDescription="16-Pin Plastic Quad Flat No-Lead, 3 x 3 mm Body, 0.5 mm Pitch, 1.7 x 1.7 mm Exposed Pad", PackageReference=RGT0016C, PackageVersion="revH, Oct-2011", Part Number=UBXH12-0000160, Part Type=Regulator, PartNumber=TPS62132RGTR, Perferred=PREF, Permitted Use="Support Products", Preset Vout(V)=3.3, RefDes=U, Regulated Outputs(#)=1, Release Data=2021-03-11T12:33:47, Released by=alvaro.nussbaum, SubFamily="Step-Down Regulator", Synchronous Rectification=TRUE, Topology=Buck, UBX Wiki=https://wiki.u-blox.com/bin/view/Operations/PartDetails?index=22570, Vin(Max)(V)=17, Vin(Min)(V)=3, Vout(Max)(V)=3.3, Vout(Min)(V)=3.3
U2: library part UBXH10-0000054, "FTDI USB TO SERIAL FULL UART INTERFACE QFN20", Manufacturer="FTDI Future Technology Devices International", Max Operating Temp=85°C, Min Operating Temp=-40°C, Editor=adam.johansson, Env=ROHS, Manufacturer P/N=FT231XQ-R, Mfg P/N Datasheet=https://wiki.u-blox.com/bin/view/Generic/Docs/DocumentSummary?index=33707, Mfg P/N Released=No, Mfg P/N Split=100, Mfg P/N Status=Active, Part Number=UBXH10-0000054, Part Type=Interface, Perferred=PREF, Permitted Use="Support Products", RefDes=U, UBX Wiki=https://wiki.u-blox.com/bin/view/Operations/PartDetails?index=27258
U3: "IC SRAM 512KBIT SPI/QUAD 8SOIC", Manufacturer="Microchip Technology", Package / Case="8-SOIC (0.154\", 3.90mm Width)", Supplier Part Number 1=23A512-I/SN-ND, Manufacturer Part Number=23A512-I/SN, Memory Interface="Qaud SPI", Memory Size=512kb, Supplier 1=Digi-Key, Technology=SRAM

## Free pads (board coordinates)
  round 1.8 hole 1.8 unplated: MTH1(23.427,31.62) MTH2(23.427,16.38) MTH3(64.068,16.38) MTH4(64.068,31.62)
  rect 0.76x2.4 on Top Solder: ""(38.16,27.25) ""(40.7,27.25) ""(41.97,27.25)

## Via types
v1: diameter 0.5, hole 0.3, Top Layer to Bottom Layer, tented both sides, 234 vias
v2: diameter 0.5/0.5/0.5/0.5 (per signal layer), hole 0.3, Top Layer to Bottom Layer, tented both sides, 166 vias

## Nets (pads, with @x,y where several pads share a name; then routed paths per layer and width w, separated by ;. In a path a pad name is that pad's centre, name@x,y a point inside that pad or via, vN(x,y) a via of type N, cw(c..) or ccw(c..) an arc to the next point about the centre after c; other vN are vias at no path point)
+1V8_IRIS_OUT: M1.L7 TP1.1 | length 16.8
  Top Layer w0.15: M1.L7@74.15,28.4 74.244,28.306 74.225,28.287 v1(74.225,27.508)
  Layer 3 w0.15: v1(65.255,17.932) 65.255,17.98 70.1,22.825 70.1,23.425 74.183,27.508 v1(74.225,27.508)
  Bottom Layer w0.15: v1(65.255,17.932) 66.169,17.018 67.282,17.018 TP1.1@67.4,16.9 ; v1(74.225,27.508) v1@74.225,27.527
+3V3: C1.1 C2.1 C4.1 C8.1 C9.1 C10.1 C11.1 C17.1 C20.1 C21.1 C22.1 J3.1 J4.1 J5.17 L1.2 LD1.2 LD2.4 M1.H1 M1.H2 M1.H3 M1.L6 R3.2 R24.2 R25.2 R39.2 R51.1 U1.14 U2.10 U2.11 U2.12 U2.20 U3.8 | length 41.1
  Top Layer w0.25: R3.2@25.6,25.6 25.7,25.5 v2(26.9,25.5) 27.4,26 U2.20@28.29,26 ; v1(57.856,20.072) 57.903,20.024 57.976,20.024 58.265,19.735 58.265,19.435 R24.2@58.4,19.3 R25.2@58.4,18.4 ; v1(58.35,23.825) 58.367,23.808 58.717,23.808 59.15,23.375 LD2.4@59.15,23.275
  Top Layer w0.254: v2(32.029,29.337) v2@32.044,29.351 ; C8.1@32.214,29.877 32.214,30 C8.1@32.237,30.023
  Top Layer w0.35: v2(29.6,21) 29.6,22.15 31.318,23.868 v2(32.41,23.868) ; J4.1@43.24,27.25 44.15,27.25 45.174,26.226 ; R39.2@45.2,19.3 45.2,21.037 45.6,21.437 ; v1(46.1,27.9) 46.1,27.153 45.174,26.226 ; v1(46.695,21.205) 46.654,21.205 46.423,21.437 45.6,21.437 ; 45.174,26.226 45.6,25.8 45.6,21.437
  Layer 3 w0.35: v2(26.9,25.5) 26.929,25.471 26.929,24.671 28.016,23.584 32.126,23.584 v2(32.41,23.868) 33.63,25.087 33.63,28.07 v2(32.8,28.9)
  Bottom Layer w0.25: J3.1@45.65,26.78 45.755,26.885 45.755,27.555 v1(46.1,27.9) ; U3.8@52.067,22.25 53.579,22.25 U3.8@53.725,22.397
  Bottom Layer w0.35: v1(72.925,27.675) 72.925,28.185 73.125,28.385 C21.1@73.125,28.4 73.087,28.437 73.087,29.163 C20.1@73.05,29.2
  other v1: 25.4,19.2 47.1,20.4 50.292,20.752 47.5,21.1 23.4,21.4 49.174,21.438 52,21.5 53.3,21.5 70.65,25.15 66.65,25.925 66,26.275 71.525,26.375 63.6,26.625 72.303,26.953
  other v2: 27.9,17.4 26.187,17.602 26.086,18.263 24.5,19.3 29.575,19.725 25.15,20.55 25.125,21.275 22.55,21.675 32.029,28.575
+3V3_IRIS_OUT: M1.L8 TP6.1 | length 24.9
  Top Layer w0.15: M1.L8@75.25,28.4 75.275,28.375 v1(75.275,27.625)
  Layer 3 w0.15: v1(63.808,18.28) 63.817,18.28 64.462,18.925 65.776,18.925 69.8,22.949 69.8,23.549 73.55,27.299 73.55,27.625 74,28.075 74.825,28.075 v1(75.275,27.625)
  Bottom Layer w0.15: TP6.1@56.45,18.65 57.025,18.075 60.919,18.075 61.092,17.902 63.439,17.902 63.808,18.27 v1(63.808,18.28) ; v1@75.241,27.659 v1(75.275,27.625)
EXT_FREQ: M1.M14
EXT_GNT: M1.M12 SW4.2 | length 57.7
  Top Layer w0.15: v2(34.6,21.1) 35.882,19.818 SW4.2@37.726,19.818 ; M1.M12@79.65,29.5 80.188,30.038 80.188,31.217 v1(79.883,31.521)